# EAGLE board CT_schematic (EAGLE 7.6.0)

Size 100 x 80 mm. Coordinates in mm from the lower left corner, seen from the top.
Outline: 0,0 100,0 100,80 0,80 0,0
Copper layers (1*16): Top 0.035mm / dielectric 1.5mm / Bottom 0.035mm
Design rules "default": minimum track width 10mil, minimum drill 24mil, track to track 8mil, track to pad 8mil, pad to pad 8mil, via to via 8mil, smd to smd 8mil, copper to edge 40mil, drill to drill 8mil, minimum pad ring 10mil, minimum via ring 8mil, stop-mask expansion 4mil, vias tented up to drill 0mil, thermal gap 10mil

## Footprints (pad centres in the part's own frame; a part is rotated, then mirrored left to right if it is on the bottom)
C0603 = smd 0.8 x 0.8: 1 -0.762,0; 2 0.762,0
C0402 = smd 0.5 x 0.5: 1 -0.508,0; 2 0.508,0
C0805 = smd 1.2 x 1.3: 1 -1.016,0; 2 1.016,0
C1206 = smd 1.3 x 1.6: 1 -1.524,0; 2 1.524,0
2220 = smd 1.85 x 5.5: 1 -2.55,0; 2 2.55,0
R0603 = smd 0.8 x 0.8: 1 -0.762,0; 2 0.762,0
EXV-9H = smd 3.505 x 1.676: 1 -2.857,0; 2 2.857,0
L0603 = smd 0.8 x 0.8: 1 -0.762,0; 2 0.762,0
WE-HCI_7030/7040/7050 = smd 2.5 x 3: 1 -2.45,0; 2 2.45,0
PJ-037B_PACKAGE = drill 3.7 square: 1 12,0 | drill 3.2 square: 2 6,0
UFBGA176_25 = smd 0.3 x 0.3: A1 -4.55,4.55; A2 -3.9,4.55; A3 -3.25,4.55; A4 -2.6,4.55; A5 -1.95,4.55; A6 -1.3,4.55; A7 -0.65,4.55; A8 0,4.55; A9 0.65,4.55; A10 1.3,4.55; A11 1.95,4.55; A12 2.6,4.55; A13 3.25,4.55; A14 3.9,4.55; A15 4.55,4.55; B1 -4.55,3.9; B2 -3.9,3.9; B3 -3.25,3.9; B4 -2.6,3.9; B5 -1.95,3.9; B6 -1.3,3.9; B7 -0.65,3.9; B8 0,3.9; B9 0.65,3.9; B10 1.3,3.9; B11 1.95,3.9; B12 2.6,3.9; B13 3.25,3.9; B14 3.9,3.9; B15 4.55,3.9; C1 -4.55,3.25; C2 -3.9,3.25; C3 -3.25,3.25; C4 -2.6,3.25; C5 -1.95,3.25; C6 -1.3,3.25; C7 -0.65,3.25; C8 0,3.25; C9 0.65,3.25; C10 1.3,3.25; C11 1.95,3.25; C12 2.6,3.25; C13 3.25,3.25; C14 3.9,3.25; C15 4.55,3.25; D1 -4.55,2.6; D2 -3.9,2.6; D3 -3.25,2.6; D4 -2.6,2.6; D5 -1.95,2.6; D6 -1.3,2.6; D7 -0.65,2.6; D8 0,2.6; D9 0.65,2.6; D10 1.3,2.6; D11 1.95,2.6; D12 2.6,2.6; D13 3.25,2.6; D14 3.9,2.6; D15 4.55,2.6; E1 -4.55,1.95; E2 -3.9,1.95; E3 -3.25,1.95; E4 -2.6,1.95; E12 2.6,1.95; E13 3.25,1.95; E14 3.9,1.95; E15 4.55,1.95; F1 -4.55,1.3; F2 -3.9,1.3; F3 -3.25,1.3; F4 -2.6,1.3; F6 -1.3,1.3; F7 -0.65,1.3; F8 0,1.3; F9 0.65,1.3; F10 1.3,1.3; F12 2.6,1.3; F13 3.25,1.3; F14 3.9,1.3; F15 4.55,1.3; G1 -4.55,0.65; G2 -3.9,0.65; G3 -3.25,0.65; G4 -2.6,0.65; G6 -1.3,0.65; G7 -0.65,0.65; G8 0,0.65; G9 0.65,0.65; G10 1.3,0.65; G12 2.6,0.65; G13 3.25,0.65; G14 3.9,0.65; G15 4.55,0.65; H1 -4.55,0; H2 -3.9,0; H3 -3.25,0; H4 -2.6,0; H6 -1.3,0; H7 -0.65,0; H8 0,0; H9 0.65,0; H10 1.3,0; H12 2.6,0; H13 3.25,0; H14 3.9,0; H15 4.55,0; J1 -4.55,-0.65; J2 -3.9,-0.65; J3 -3.25,-0.65; J4 -2.6,-0.65; J6 -1.3,-0.65; J7 -0.65,-0.65; J8 0,-0.65; J9 0.65,-0.65; J10 1.3,-0.65; J12 2.6,-0.65; J13 3.25,-0.65; J14 3.9,-0.65; J15 4.55,-0.65; K1 -4.55,-1.3; K2 -3.9,-1.3; K3 -3.25,-1.3; K4 -2.6,-1.3; K6 -1.3,-1.3; K7 -0.65,-1.3; K8 0,-1.3; K9 0.65,-1.3; K10 1.3,-1.3; K12 2.6,-1.3; K13 3.25,-1.3; K14 3.9,-1.3; K15 4.55,-1.3; L1 -4.55,-1.95; L2 -3.9,-1.95; L3 -3.25,-1.95; L4 -2.6,-1.95; L12 2.6,-1.95; L13 3.25,-1.95; L14 3.9,-1.95; L15 4.55,-1.95; M1 -4.55,-2.6; M2 -3.9,-2.6; M3 -3.25,-2.6; M4 -2.6,-2.6; M5 -1.95,-2.6; M6 -1.3,-2.6; M7 -0.65,-2.6; M8 0,-2.6; M9 0.65,-2.6; M10 1.3,-2.6; M11 1.95,-2.6; M12 2.6,-2.6; M13 3.25,-2.6; M14 3.9,-2.6; M15 4.55,-2.6; N1 -4.55,-3.25; N2 -3.9,-3.25; N3 -3.25,-3.25; N4 -2.6,-3.25; N5 -1.95,-3.25; N6 -1.3,-3.25; N7 -0.65,-3.25; N8 0,-3.25; N9 0.65,-3.25; N10 1.3,-3.25; N11 1.95,-3.25; N12 2.6,-3.25; N13 3.25,-3.25; N14 3.9,-3.25; N15 4.55,-3.25; P1 -4.55,-3.9; P2 -3.9,-3.9; P3 -3.25,-3.9; P4 -2.6,-3.9; P5 -1.95,-3.9; P6 -1.3,-3.9; P7 -0.65,-3.9; P8 0,-3.9; P9 0.65,-3.9; P10 1.3,-3.9; P11 1.95,-3.9; P12 2.6,-3.9; P13 3.25,-3.9; P14 3.9,-3.9; P15 4.55,-3.9; R1 -4.55,-4.55; R2 -3.9,-4.55; R3 -3.25,-4.55; R4 -2.6,-4.55; R5 -1.95,-4.55; R6 -1.3,-4.55; R7 -0.65,-4.55; R8 0,-4.55; R9 0.65,-4.55; R10 1.3,-4.55; R11 1.95,-4.55; R12 2.6,-4.55; R13 3.25,-4.55; R14 3.9,-4.55; R15 4.55,-4.55
A2500R24A00GM = smd 1.5 x 0.61: 1 -3,7; 2 -3,6; 3 -3,5; 4 -3,4; 5 -3,3; 6 -3,2; 7 -3,1; 8 -3,0; 17 5.22,0; 18 5.22,1; 19 5.22,2; 20 5.22,3; 21 5.22,4; 22 5.22,5; 23 5.22,6; 24 5.22,7 | smd 0.61 x 1.5: 9 -2.39,-1.6; 10 -1.39,-1.6; 11 -0.39,-1.6; 12 0.61,-1.6; 13 1.61,-1.6; 14 2.61,-1.6; 15 3.61,-1.6; 16 4.61,-1.6 | smd 1 x 1: 25 -2.8,9; 26 -2.8,13; 27 5.02,9; 28 5.02,13; 29 0.11,5.75; 30 2.11,5.75
TST-110-05-T-D-RA = drill 1 pad 1.7 square: 1 0,0 | drill 1 pad 1.7: 2 0,2.54; 3 2.54,0; 4 2.54,2.54; 5 5.08,0; 6 5.08,2.54; 7 7.62,0; 8 7.62,2.54; 9 10.16,0; 10 10.16,2.54; 11 12.7,0; 12 12.7,2.54; 13 15.24,0; 14 15.24,2.54; 15 17.78,0; 16 17.78,2.54; 17 20.32,0; 18 20.32,2.54; 19 22.86,0; 20 22.86,2.54
LBGA-64 = smd 0.559 x 0.559: A1 -3.5,3.5; A2 -2.5,3.5; A3 -1.5,3.5; A4 -0.5,3.5; A5 0.5,3.5; A6 1.5,3.5; A7 2.5,3.5; A8 3.5,3.5; B1 -3.5,2.5; B2 -2.5,2.5; B3 -1.5,2.5; B4 -0.5,2.5; B5 0.5,2.5; B6 1.5,2.5; B7 2.5,2.5; B8 3.5,2.5; C1 -3.5,1.5; C2 -2.5,1.5; C3 -1.5,1.5; C4 -0.5,1.5; C5 0.5,1.5; C6 1.5,1.5; C7 2.5,1.5; C8 3.5,1.5; D1 -3.5,0.5; D2 -2.5,0.5; D3 -1.5,0.5; D4 -0.5,0.5; D5 0.5,0.5; D6 1.5,0.5; D7 2.5,0.5; D8 3.5,0.5; E1 -3.5,-0.5; E2 -2.5,-0.5; E3 -1.5,-0.5; E4 -0.5,-0.5; E5 0.5,-0.5; E6 1.5,-0.5; E7 2.5,-0.5; E8 3.5,-0.5; F1 -3.5,-1.5; F2 -2.5,-1.5; F3 -1.5,-1.5; F4 -0.5,-1.5; F5 0.5,-1.5; F6 1.5,-1.5; F7 2.5,-1.5; F8 3.5,-1.5; G1 -3.5,-2.5; G2 -2.5,-2.5; G3 -1.5,-2.5; G4 -0.5,-2.5; G5 0.5,-2.5; G6 1.5,-2.5; G7 2.5,-2.5; G8 3.5,-2.5; H1 -3.5,-3.5; H2 -2.5,-3.5; H3 -1.5,-3.5; H4 -0.5,-3.5; H5 0.5,-3.5; H6 1.5,-3.5; H7 2.5,-3.5; H8 3.5,-3.5
ABS07-32.768KHZ-7-T = smd 1.1 x 2.4: 1 -2.5,0; 2 0,0
ABLS-25.000MHZ-B2F-T = smd 5.6 x 2.8: 1 -3.81,0; 2 5.69,0
WSON-8 = smd 0.3 x 0.6: 1 -0.75,0; 2 0.05,0; 3 0.85,0; 4 1.65,0; 5 1.65,3.8; 6 0.85,3.8; 7 0.05,3.8; 8 -0.75,3.8 | smd 3 x 2.6: PAD 0.45,1.9
QFN-16_EP = smd 0.805 x 0.3: 1 -1.452,0.75; 2 -1.452,0.25; 3 -1.452,-0.25; 4 -1.452,-0.75; 9 1.452,-0.75; 10 1.452,-0.25; 11 1.452,0.25; 12 1.452,0.75 | smd 0.3 x 0.805: 5 -0.75,-1.452; 6 -0.25,-1.452; 7 0.25,-1.452; 8 0.75,-1.452; 13 0.75,1.452; 14 0.25,1.452; 15 -0.25,1.452; 16 -0.75,1.452 | smd 1.55 x 1.55: 17 0,0
QFN-38_UHF = smd 0.75 x 0.3: 1 -2.4,2.75; 2 -2.4,2.25; 3 -2.4,1.75; 4 -2.4,1.25; 6 -2.4,0.25; 7 -2.4,-0.25; 8 -2.4,-0.75; 9 -2.4,-1.25; 10 -2.4,-1.75; 11 -2.4,-2.25; 12 -2.4,-2.75; 20 2.4,-2.75; 21 2.4,-2.25; 22 2.4,-1.75; 23 2.4,-1.25; 24 2.4,-0.75; 25 2.4,-0.25; 26 2.4,0.25; 27 2.4,0.75; 28 2.4,1.25; 29 2.4,1.75; 30 2.4,2.25; 31 2.4,2.75 | smd 0.758 x 0.3: 5 -2.4,0.75 | smd 0.3 x 0.75: 13 -1.5,-3.4; 14 -1,-3.4; 15 -0.5,-3.4; 16 0,-3.4; 17 0.5,-3.4; 18 1,-3.4; 19 1.5,-3.4; 32 1.5,3.4; 33 1,3.4; 34 0.5,3.4; 35 0,3.4; 36 -0.5,3.4; 37 -1,3.4; 38 -1.5,3.4 | smd 3.2 x 5.2: 39 0,0
IRF8306MTRPBF = smd 0.9 x 1.85: 1 0,0; 2 0,-2.35; 6 6.4,0; 7 6.4,-2.35 | smd 0.75 x 0.75: 3 1.75,-1.175 | smd 1.45 x 0.87: 4 3.5,-0.565; 5 3.5,-1.785
SW_4-1437565-2 = smd 1.4 x 2.1: 1 -2.23,4.55; 2 -2.23,-4.55; 3 2.23,4.55; 4 2.23,-4.55
LGM67K-G1J2-24-Z = smd 0.8 x 1.4: A -2,0; C 0,0
NC7SZ125M5X = smd 1.3 x 0.7: 1 -1.3,0.95; 2 -1.3,0; 3 -1.3,-0.95; 4 1.3,-0.95; 5 1.3,0.95

## Placement (x,y rotation side)
C1  1e-06  [C0603]  -19.05,74.93 0 top  (outside the outline)
C2  1e-07  [C0603]  -22.86,74.93 0 top  (outside the outline)
C3  1e-07  [C0603]  -26.67,74.93 0 top  (outside the outline)
C4  1e-07  [C0603]  -30.48,74.93 0 top  (outside the outline)
C5  1e-07  [C0603]  -34.29,74.93 0 top  (outside the outline)
C6  1e-07  [C0603]  -38.1,74.93 0 top  (outside the outline)
C7  1e-07  [C0603]  -41.91,74.93 0 top  (outside the outline)
C8  1e-07  [C0603]  -45.72,74.93 0 top  (outside the outline)
C9  1e-07  [C0603]  -49.53,74.93 0 top  (outside the outline)
C10  1e-07  [C0603]  -53.34,74.93 0 top  (outside the outline)
C11  1e-07  [C0603]  -57.15,74.93 0 top  (outside the outline)
C12  1e-07  [C0603]  -60.96,74.93 0 top  (outside the outline)
C13  1e-07  [C0603]  -64.77,74.93 0 top  (outside the outline)
C14  1e-07  [C0603]  -68.58,74.93 0 top  (outside the outline)
C15  1e-07  [C0603]  -72.39,74.93 0 top  (outside the outline)
C16  1e-07  [C0603]  -76.2,74.93 0 top  (outside the outline)
C17  4.7e-06  [C0603]  -74.93,69.85 0 top  (outside the outline)
C18  1e-08  [C0603]  -15.24,80.01 0 top  (outside the outline)
C19  1e-06  [C0603]  -19.05,80.01 0 top  (outside the outline)
C20  1e-07  [C0603]  -22.86,80.01 0 top  (outside the outline)
C21  1e-07  [C0603]  -26.67,80.01 0 top  (outside the outline)
C22  1e-07  [C0603]  -30.48,80.01 0 top  (outside the outline)
C23  1e-11  [C0402]  -68.58,80.01 0 top  (outside the outline)
C24  1e-11  [C0402]  -72.39,80.01 0 top  (outside the outline)
C25  1e-11  [C0402]  -76.2,80.01 0 top  (outside the outline)
C26  1e-11  [C0402]  -15.24,85.09 0 top  (outside the outline)
C27  1e-05  [C0805]  -53.34,57.15 0 top  (outside the outline)
C28  1e-07  [C0402]  -19.05,85.09 0 top  (outside the outline)
C29  1e-08  [C0402]  -22.86,85.09 0 top  (outside the outline)
C30  1e-08  [C0402]  -26.67,85.09 0 top  (outside the outline)
C31  1e-08  [C0402]  -30.48,85.09 0 top  (outside the outline)
C32  1e-05  [C1206]  -29.21,57.15 0 top  (outside the outline)
C33  1e-05  [C0805]  -58.42,57.15 0 top  (outside the outline)
C34  1e-05  [C0805]  -63.5,57.15 0 top  (outside the outline)
C35  1e-06  [C0603]  -34.29,80.01 0 top  (outside the outline)
C36  1e-07  [C0402]  -34.29,85.09 0 top  (outside the outline)
C37  6.8e-05  [2220]  -74.93,30.48 0 top  (outside the outline)
C38  1e-07  [C0402]  -38.1,85.09 0 top  (outside the outline)
C39  2.2e-06  [C0603]  -15.24,74.93 0 top  (outside the outline)
C40  2.45e-08  [R0603]  -31.75,64.77 0 top  (outside the outline)
C41  2.8258362168397e-09  [R0603]  -73.66,57.15 0 top  (outside the outline)
C42  7.105e-09  [R0603]  -16.51,64.77 0 top  (outside the outline)
C43  0.0001  [EXV-9H]  -17.78,50.8 0 top  (outside the outline)
C44  0.0001  [EXV-9H]  -29.21,50.8 0 top  (outside the outline)
C45  1e-08  [C0402]  -41.91,85.09 0 top  (outside the outline)
C46  1e-08  [C0402]  -45.72,85.09 0 top  (outside the outline)
C47  1e-08  [C0402]  -49.53,85.09 0 top  (outside the outline)
F1  240.0  [L0603]  -38.1,80.01 0 top  (outside the outline)
I1  3.3e-06  [WE-HCI_7030/7040/7050]  -17.78,31.75 0 top  (outside the outline)
J1  PJ-037B  [PJ-037B_PACKAGE]  -76.2,7.62 0 top  (outside the outline)
R2  1000.0  [R0603]  -41.91,80.01 0 top  (outside the outline)
R7  4700.0  [R0603]  -45.72,80.01 0 top  (outside the outline)
R8  4700.0  [R0603]  -49.53,80.01 0 top  (outside the outline)
R9  10000.0  [R0603]  -36.83,64.77 0 top  (outside the outline)
R10  10000.0  [R0603]  -41.91,64.77 0 top  (outside the outline)
R11  10000.0  [R0603]  -46.99,64.77 0 top  (outside the outline)
R12  10000.0  [R0603]  -52.07,64.77 0 top  (outside the outline)
R13  10000.0  [R0603]  -57.15,64.77 0 top  (outside the outline)
R14  10000.0  [R0603]  -62.23,64.77 0 top  (outside the outline)
R15  10000.0  [R0603]  -67.31,64.77 0 top  (outside the outline)
R16  10000.0  [R0603]  -72.39,64.77 0 top  (outside the outline)
R17  10000.0  [R0603]  -77.47,64.77 0 top  (outside the outline)
R18  100000.0  [R0603]  -21.59,64.77 0 top  (outside the outline)
R19  200.0  [R0603]  -53.34,80.01 0 top  (outside the outline)
R20  1000.0  [R0603]  -57.15,80.01 0 top  (outside the outline)
R21  20000.0  [R0603]  -15.24,69.85 0 top  (outside the outline)
R22  91000.0  [R0603]  -20.32,69.85 0 top  (outside the outline)
R23  300000.0  [R0603]  -26.67,64.77 0 top  (outside the outline)
R24  10000.0  [R0603]  -25.4,69.85 0 top  (outside the outline)
R25  75000.0  [R0603]  -30.48,69.85 0 top  (outside the outline)
R26  10000.0  [R0603]  -35.56,69.85 0 top  (outside the outline)
R27  10000.0  [R0603]  -40.64,69.85 0 top  (outside the outline)
R28  95300.0  [R0603]  -45.72,69.85 0 top  (outside the outline)
R29  95300.0  [R0603]  -50.8,69.85 0 top  (outside the outline)
R30  10000.0  [R0603]  -55.88,69.85 0 top  (outside the outline)
R31  10000.0  [R0603]  -60.96,69.85 0 top  (outside the outline)
R32  10000.0  [R0603]  -66.04,69.85 0 top  (outside the outline)
R33  49900.0  [R0603]  -71.12,69.85 0 top  (outside the outline)
U1  STM32F745IEK7  [UFBGA176_25]  -53.34,6.35 0 top  (outside the outline)
U2  A2500R24A00GM  [A2500R24A00GM]  -27.94,7.62 0 top  (outside the outline)
U3  TST-110-05-T-D-RA  [TST-110-05-T-D-RA]  -76.2,39.37 0 top  (outside the outline)
U4  mt28ew512aba1HPC-0AAT  [LBGA-64]  -39.37,7.62 0 top  (outside the outline)
U5  ABS07-32.768KHZ-7-T  [ABS07-32.768KHZ-7-T]  -71.12,50.8 0 top  (outside the outline)
U6  ABLS-25.000MHZ-B2F-T  [ABLS-25.000MHZ-B2F-T]  -48.26,50.8 0 top  (outside the outline)
U7  LP3878SDX-ADJ/NOPB  [WSON-8]  -30.48,40.64 0 top  (outside the outline)
U8  LTC3601EUD#PBF  [QFN-16_EP]  -62.23,80.01 0 top  (outside the outline)
U9  LTC2928CUHF#PBF  [QFN-38_UHF]  -36.83,41.91 0 top  (outside the outline)
U10  IRF8306MTRPbF  [IRF8306MTRPBF]  -54.61,31.75 0 top  (outside the outline)
U11  IRF8306MTRPbF  [IRF8306MTRPBF]  -69.85,31.75 0 top  (outside the outline)
U12  4-1437565-2  [SW_4-1437565-2]  -36.83,31.75 0 top  (outside the outline)
U13  Q65110A2395  [LGM67K-G1J2-24-Z]  -17.78,58.42 0 top  (outside the outline)
U14  nc7sz125m5x  [NC7SZ125M5X]  -34.29,57.15 0 top  (outside the outline)
U15  nc7sz125m5x  [NC7SZ125M5X]  -40.64,57.15 0 top  (outside the outline)
U16  nc7sz125m5x  [NC7SZ125M5X]  -46.99,57.15 0 top  (outside the outline)

## Library data of the parts
C1-C47 F1 I1 J1 R2 R7-R33 U1-U16 = circuit_tree

## Nets
CLK_CRYSTAL_U1_E1: C23.1 U1.E1 U5.1
CLK_CRYSTAL_U1_F1: C24.1 U1.F1 U5.2
CLK_CRYSTAL_U1_G1: C25.1 U1.G1 U6.1
CLK_CRYSTAL_U1_H1: C26.1 U1.H1 U6.2
GND: C1.2 C2.2 C3.2 C4.2 C5.2 C6.2 C7.2 C8.2 C9.2 C10.2 C11.2 C12.2 C13.2 C14.2 C15.2 C16.2 C17.2 C18.2 C19.2 C20.2 C21.2 C22.2 C23.2 C24.2 C25.2 C26.2 C27.2 C28.2 C29.2 C30.2 C31.2 C32.2 C33.2 C34.2 C35.2 C37.1 C37.2 C38.2 C39.2 C40.2 C41.2 C42.2 C43.2 C44.2 C45.2 C46.2 C47.2 J1.2 R2.2 R9.2 R20.2 R21.2 R23.2 R25.2 R28.2 R29.2 R30.2 R31.2 R32.2 U1.D5 U1.D7 U1.D8 U1.D9 U1.F2 U1.F6 U1.F7 U1.F8 U1.F9 U1.F10 U1.F12 U1.G2 U1.G6 U1.G7 U1.G8 U1.G9 U1.G10 U1.G12 U1.H6 U1.H7 U1.H8 U1.H9 U1.H10 U1.H12 U1.J6 U1.J7 U1.J8 U1.J9 U1.J10 U1.K6 U1.K7 U1.K8 U1.K9 U1.K10 U1.M1 U1.M8 U1.M9 U1.N1 U2.8 U2.17 U3.4 U3.6 U3.8 U3.10 U3.12 U3.14 U3.16 U3.18 U3.20 U4.E8 U4.H2 U4.H7 U7.3 U7.PAD U8.1 U8.9 U8.17 U9.8 U9.9 U9.10 U9.12 U9.13 U9.24 U9.25 U9.30 U9.32 U9.39 U13.C U14.2 U14.3 U15.1 U15.3 U16.1 U16.3
NET_U1_C6: R10.1 U1.C6
NET_U1_D6: R9.1 U1.D6
NET_U1_F13: C22.1 U1.F13
NET_U1_J1: R8.1 U1.J1 U16.4
NET_U1_L4: R11.1 U1.L4
NET_U1_R1: C18.1 C19.1 F1.1 U1.P1 U1.R1
NET_U1_R14: U13.A
NET_U1_R15: U12.3 U12.4
NET_U4_B4: R16.1 U4.B4
NET_U4_B5: R7.1 U4.B5 U15.4
NET_U7_1: C31.1 U7.1
NET_U7_6: R19.2 R20.1 U7.6
NET_U7_8: R18.1 U7.8
NET_U8_3: C36.2 I1.1 U8.3 U8.4
NET_U8_6: C36.1 U8.6
NET_U8_7: C35.1 U8.7 U8.12
NET_U8_10: R23.1 U8.10
NET_U8_11: R21.1 R22.1 U8.11
NET_U8_14: U8.14
NET_U8_ATNET_3: I1.2 R22.2
NET_U9_3: R31.1 U9.3
NET_U9_6: R28.1 U9.6
NET_U9_7: R29.1 U9.7
NET_U9_16: R30.1 R33.1 U9.16
NET_U9_18: R27.1 U9.18
NET_U9_19: R26.1 U9.19 U9.20
NET_U9_21: R24.1 R25.1 U9.21 U14.4 U15.2 U16.2
NET_U9_26: C41.1 U9.26
NET_U9_27: C40.1 U9.27
NET_U9_28: C42.1 U9.28
NET_U9_38: R32.1 U9.38
NET_U10_3: U9.2 U10.3
NET_U11_3: U9.37 U11.3
NET_U12_1: R2.1 U12.1 U12.2
PROC_FMC_A0: U1.E2 U4.E2
PROC_FMC_A1: U1.H3 U4.D2
PROC_FMC_A2: U1.H2 U4.C2
PROC_FMC_A3: U1.J2 U4.A2
PROC_FMC_A4: U1.J3 U4.B2
PROC_FMC_A5: U1.K3 U4.D3
PROC_FMC_A6: U1.P6 U4.C3
PROC_FMC_A9: U1.P7 U4.A6
PROC_FMC_A10: U1.N7 U4.C6
PROC_FMC_A11: U1.M7 U4.D6
PROC_FMC_A12: U1.L15 U4.B7
PROC_FMC_A13: U1.K15 U4.A7
PROC_FMC_A14: U1.K14 U4.C7
PROC_FMC_A15: U1.K13 U4.D7
PROC_FMC_A16: U1.N14 U4.E7
PROC_FMC_A17: U1.N13 U4.B3
PROC_FMC_A18: U1.M15 U4.C4
PROC_FMC_A19: U1.A1 U4.D5
PROC_FMC_A20: U1.B1 U4.D4
PROC_FMC_A21: U1.B2 U4.C5
PROC_FMC_A22: U1.B3 U4.B8
PROC_FMC_A23: U1.A2 U4.C8
PROC_FMC_A24: U1.A8 U4.F8
PROC_FMC_D0: U1.M14 U4.E3
PROC_FMC_D1: U1.L14 U4.H3
PROC_FMC_D2: U1.B12 U4.E4
PROC_FMC_D3: U1.C12 U4.H4
PROC_FMC_D4: U1.R8 U4.H5
PROC_FMC_D5: U1.P8 U4.E5
PROC_FMC_D6: U1.P9 U4.H6
PROC_FMC_D7: U1.R9 U4.E6
PROC_FMC_D8: U1.P10 U4.F3
PROC_FMC_D9: U1.R10 U4.G3
PROC_FMC_D10: U1.N11 U4.F4
PROC_FMC_D11: U1.P11 U4.G4
PROC_FMC_D12: U1.R11 U4.F5
PROC_FMC_D13: U1.P15 U4.G6
PROC_FMC_D14: U1.P14 U4.F6
PROC_FMC_D15: U1.N15 U4.G7
PROC_FMC_NBL0: R17.1 U1.A4 U4.F7
PROC_FMC_NE2: R13.1 U1.C10 U4.F2
PROC_FMC_NOE: R14.1 U1.D10 U4.G2
PROC_FMC_NWAIT: U1.B11 U4.A4
PROC_FMC_NWE: R15.1 U1.C11 U4.A5
PROC_SPI1_MISO: U1.A9 U2.10
PROC_SPI1_MOSI: U1.A6 U2.11
PROC_SPI1_NSS: U1.A13 U2.12
PROC_SPI1_SCK: U1.P4 U2.9
PROC_SYS_JTCK_SWCLK: U3.9
PROC_SYS_JTDO_SWO: U3.13
PROC_SYS_JTMS_SWDIO: U3.7
RST_OUT_U3_SRESET_B: R12.1 U3.15 U14.1
VCC_6V7: C38.1 C39.1 C43.1 C44.1 J1.1 R24.2 R26.2 R27.2 R33.2 U9.11 U9.22 U10.1 U10.2 U10.6 U10.7 U11.1 U11.2 U11.6 U11.7
VCC_S1_6V7: C32.1 C34.1 R18.2 U7.4 U8.15 U8.16 U10.4 U10.5
VCC_S2_6V7: U11.4 U11.5
VCC_TIER1_1V2: C21.1 C33.1 R19.1 U1.M10 U7.5
VCC_TIER1_3V3: C1.1 C2.1 C3.1 C4.1 C5.1 C6.1 C7.1 C8.1 C9.1 C10.1 C11.1 C12.1 C13.1 C14.1 C15.1 C16.1 C17.1 C20.1 C27.1 C28.1 C29.1 C30.1 C37.2 C45.1 C46.1 C47.1 F1.2 I1.2 R7.2 R8.2 R10.2 R11.2 R12.2 R13.2 R14.2 R15.2 R16.2 R17.2 R22.2 U1.C1 U1.C5 U1.C7 U1.C8 U1.C9 U1.F3 U1.G3 U1.G13 U1.H13 U1.J12 U1.J13 U1.K4 U1.N8 U1.N9 U1.N10 U2.18 U3.1 U4.D8 U4.F1 U4.G5 U8.8 U14.5 U15.5 U16.5

## Tracks (layer width: path | path; a pad name or v marks a point on that pad's centre or on a via)
CLK_CRYSTAL_U1_E1  (2 unrouted)
CLK_CRYSTAL_U1_F1  (2 unrouted)
CLK_CRYSTAL_U1_G1  (2 unrouted)
CLK_CRYSTAL_U1_H1  (2 unrouted)
GND  (132 unrouted)
NET_U1_C6  (1 unrouted)
NET_U1_D6  (1 unrouted)
NET_U1_F13  (1 unrouted)
NET_U1_J1  (2 unrouted)
NET_U1_L4  (1 unrouted)
NET_U1_R1  (4 unrouted)
NET_U1_R15  (1 unrouted)
NET_U4_B4  (1 unrouted)
NET_U4_B5  (2 unrouted)
NET_U7_1  (1 unrouted)
NET_U7_6  (2 unrouted)
NET_U7_8  (1 unrouted)
NET_U8_3  (3 unrouted)
NET_U8_6  (1 unrouted)
NET_U8_7  (2 unrouted)
NET_U8_10  (1 unrouted)
NET_U8_11  (2 unrouted)
NET_U8_ATNET_3  (1 unrouted)
NET_U9_3  (1 unrouted)
NET_U9_6  (1 unrouted)
NET_U9_7  (1 unrouted)
NET_U9_16  (2 unrouted)
NET_U9_18  (1 unrouted)
NET_U9_19  (2 unrouted)
NET_U9_21  (5 unrouted)
NET_U9_26  (1 unrouted)
NET_U9_27  (1 unrouted)
NET_U9_28  (1 unrouted)
NET_U9_38  (1 unrouted)
NET_U10_3  (1 unrouted)
NET_U11_3  (1 unrouted)
NET_U12_1  (2 unrouted)
PROC_FMC_A0  (1 unrouted)
PROC_FMC_A1  (1 unrouted)
PROC_FMC_A2  (1 unrouted)
PROC_FMC_A3  (1 unrouted)
PROC_FMC_A4  (1 unrouted)
PROC_FMC_A5  (1 unrouted)
PROC_FMC_A6  (1 unrouted)
PROC_FMC_A9  (1 unrouted)
PROC_FMC_A10  (1 unrouted)
PROC_FMC_A11  (1 unrouted)
PROC_FMC_A12  (1 unrouted)
PROC_FMC_A13  (1 unrouted)
PROC_FMC_A14  (1 unrouted)
PROC_FMC_A15  (1 unrouted)
PROC_FMC_A16  (1 unrouted)
PROC_FMC_A17  (1 unrouted)
PROC_FMC_A18  (1 unrouted)
PROC_FMC_A19  (1 unrouted)
PROC_FMC_A20  (1 unrouted)
PROC_FMC_A21  (1 unrouted)
PROC_FMC_A22  (1 unrouted)
PROC_FMC_A23  (1 unrouted)
PROC_FMC_A24  (1 unrouted)
PROC_FMC_D0  (1 unrouted)
PROC_FMC_D1  (1 unrouted)
PROC_FMC_D2  (1 unrouted)
PROC_FMC_D3  (1 unrouted)
PROC_FMC_D4  (1 unrouted)
PROC_FMC_D5  (1 unrouted)
PROC_FMC_D6  (1 unrouted)
PROC_FMC_D7  (1 unrouted)
PROC_FMC_D8  (1 unrouted)
PROC_FMC_D9  (1 unrouted)
PROC_FMC_D10  (1 unrouted)
PROC_FMC_D11  (1 unrouted)
PROC_FMC_D12  (1 unrouted)
PROC_FMC_D13  (1 unrouted)
PROC_FMC_D14  (1 unrouted)
PROC_FMC_D15  (1 unrouted)
PROC_FMC_NBL0  (2 unrouted)
PROC_FMC_NE2  (2 unrouted)
PROC_FMC_NOE  (2 unrouted)
PROC_FMC_NWAIT  (1 unrouted)
PROC_FMC_NWE  (2 unrouted)
PROC_SPI1_MISO  (1 unrouted)
PROC_SPI1_MOSI  (1 unrouted)
PROC_SPI1_NSS  (1 unrouted)
PROC_SPI1_SCK  (1 unrouted)
RST_OUT_U3_SRESET_B  (2 unrouted)
VCC_6V7  (18 unrouted)
VCC_S1_6V7  (7 unrouted)
VCC_S2_6V7  (1 unrouted)
VCC_TIER1_1V2  (4 unrouted)
VCC_TIER1_3V3  (62 unrouted)